# Altium PCB usbasp_V2.PcbDoc
Units mm, origin at the board's own origin, x right, y up, seen from the top; angles counter-clockwise.
Board outline 45.25 x 16.12 mm, 2 copper layers (Top Layer, Bottom Layer), stack 1.635 mm thick; 24 components, 20 nets, 95 pads, 37 vias.
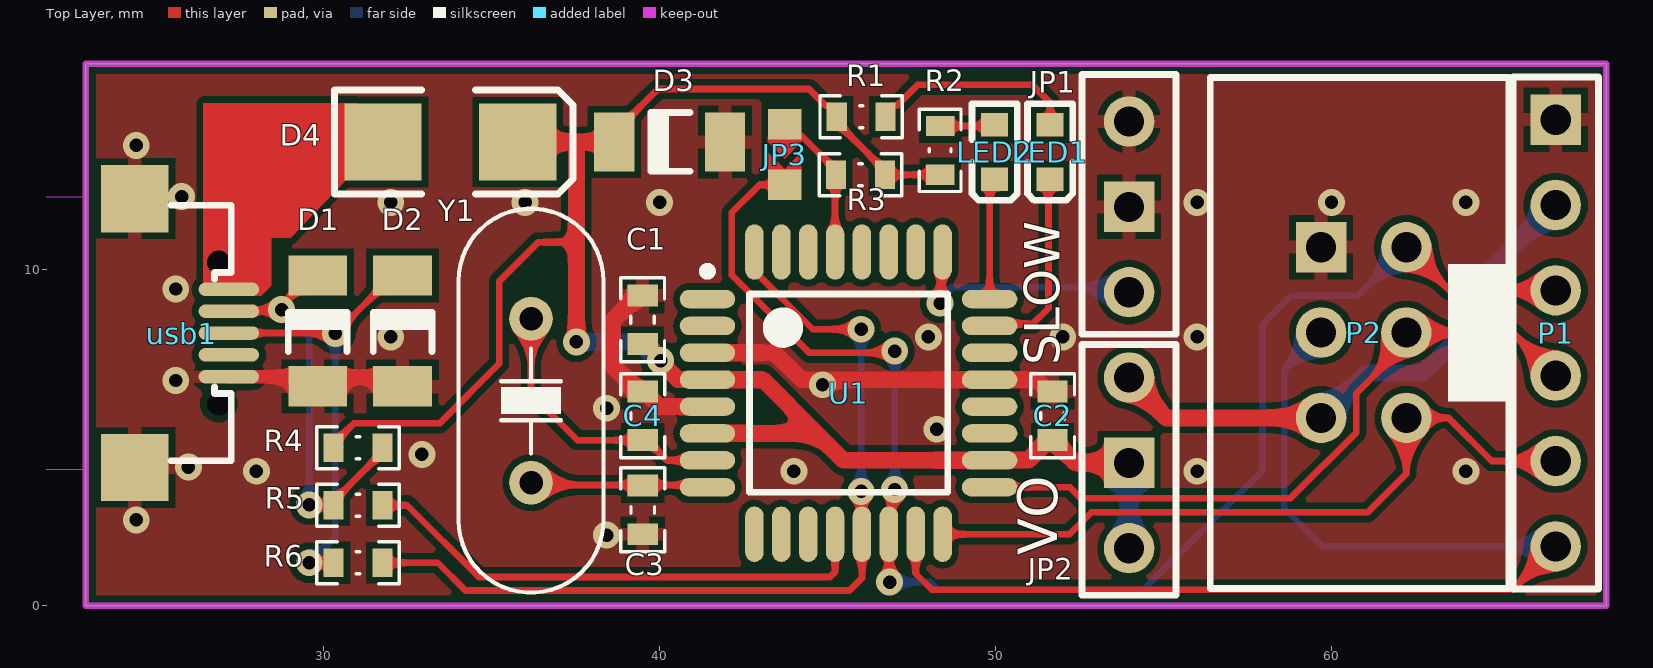
[diagram p0: Top Layer view]
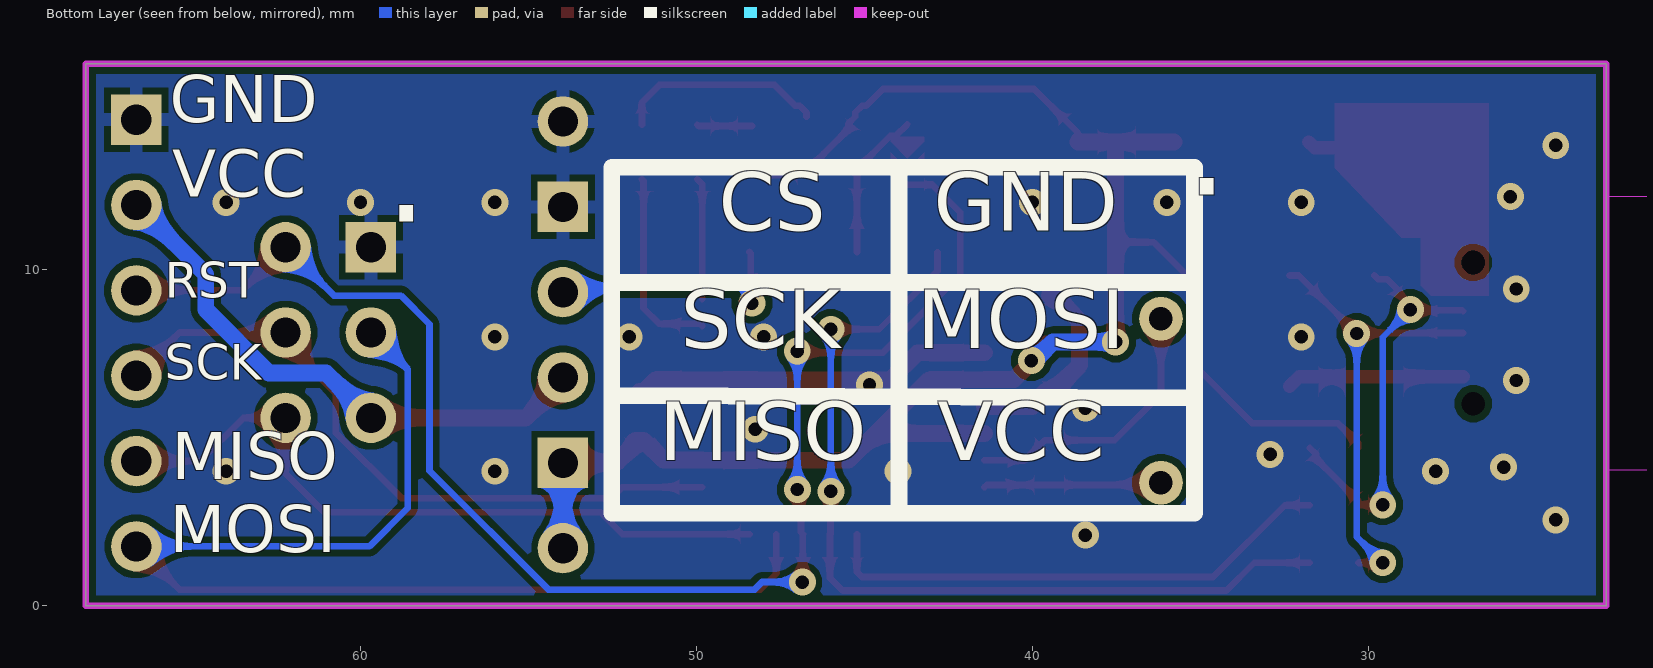
[diagram p1: Bottom Layer view, seen from below]
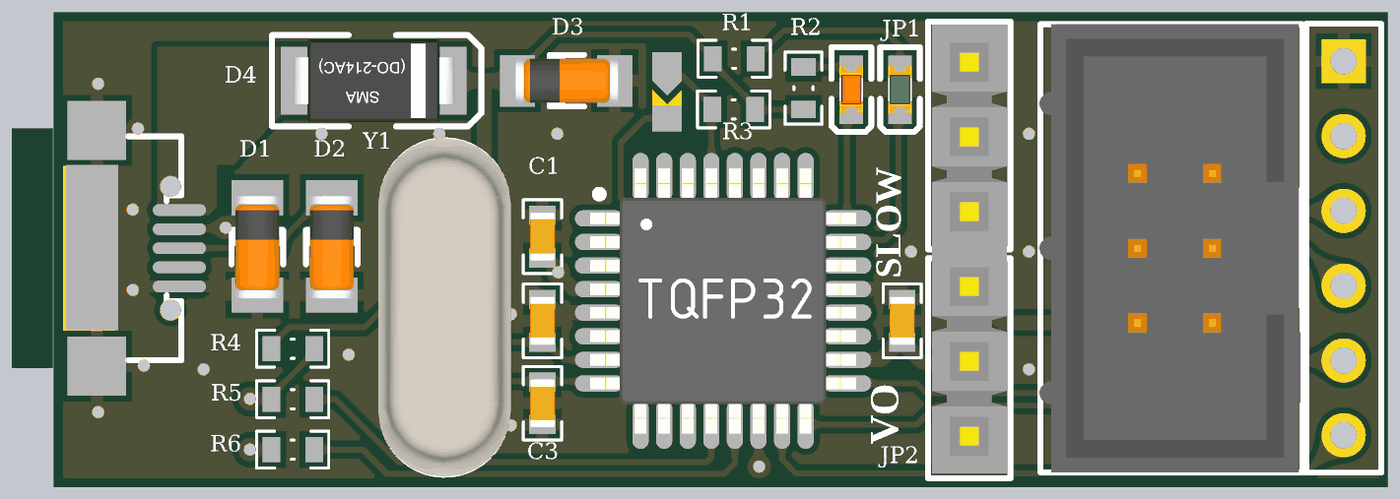
[diagram p2: 3D render of the assembled board from above, using the file's embedded part models]

## Layer stack, top to bottom
Top Solder: solder mask 0.0102, Solder Resist, Dk 3.5
Top Layer: signal copper 0.0175
Dielectric 1: dielectric 1.6, FR-4, Dk 4.8
Bottom Layer: signal copper 0.0175
Bottom Solder: solder mask 0.0102, Solder Resist, Dk 3.5

## Board outline
22.925,0 22.925,16.125 68.175,16.125 68.175,0

## Design rules (kind name [scope] priority, off if disabled: settings)
Clearance [All] p1: gap=0.2 ignorepadtopadclearanceinfootprint=FALSE except(0: Arc-Hole Track-Hole SMDPad-Hole THPad-Hole Via-Hole Fill-Hole Poly-Hole Region-Hole Text-Hole)
PolygonConnect [All] p1: thpad.connectstyle=Relief thpad.reliefconductorwidth=0.4 thpad.reliefentries=4 thpad.polygonreliefangle="90 Angle" thpad.airgapwidth=0.2 smdpad.connectstyle=Relief smdpad.reliefconductorwidth=0.4 smdpad.reliefentries=4 smdpad.polygonreliefangle="90 Angle" smdpad.airgapwidth=0.2 via.connectstyle=Direct via.reliefconductorwidth=0.254 via.reliefentries=4 via.polygonreliefangle="90 Angle" via.airgapwidth=0.254
RoomDefinition usbasp [InComponentClass('usbasp')] p1 off: confinementstyle=ConfineIn formatcopy=TRUE lockcomponents=FALSE outline 157.988,3.048 288.798,3.048 288.798,21.336 157.988,21.336
RoutingVias [All] p1: holewidth=0.5 width=1 viastyle="Through Hole" minholewidth=0.4 minwidth=0.8 maxholewidth=1 maxwidth=1.5
SolderMaskExpansion [All] p1: expansion=0 istentingtop=FALSE
Width [All] p1: maxlimit=0.8 minlimit=0.2 preferedwidth=0.3
30 further rules are at their usual default settings.

## Components (designator, comment, footprint, x,y, rotation, side; value= is the part's Value field where it differs from the comment)
C1 "Cap" cap0603 39.497,8.509 r270 top value=100nF
C2 "Cap" cap0603 51.7,5.65 r90 top value=1u
C3 "Cap" cap0603 39.5,2.85 r90 top value=22pF
C4 "Cap" cap0603 39.5,5.65 r270 top value=22pF
D1 "Diode Zener" "Diode 1n4148 SMD" 29.825,6.525 r90 top
D2 "Diode Zener" "Diode 1n4148 SMD" 32.35,6.525 r90 top
D3 "Diode Zener" "Diode 1n4148 SMD" 41.95,13.8 r180 top
D4 "1n5822" DO-214AC(SMA) 33.775,13.8 r270 top
JP1 "Slow clk" "jumper selector" 53.975,9.329 r90 top
JP2 "VCC OUT" "jumper selector" 53.975,1.709 r90 top
JP3 "Jumper 2Pin" PCBComponent_1 43.725,13.3 r270 top
LED1 "Green" "LED_0603 G" 51.625,13.5 r270 top
LED2 "Red" "LED_0603 R" 49.975,13.5 r270 top
P1 "Header 6" HDR1X6 66.675,1.763 r90 top locked
P2 "IDC 2X3" "IDC Socket Male 6pin Straight THT Goldplated 2_54mm" 60.96,8.128 r90 top locked
R1 "1K" RES0603 46,14.55 r180 top
R2 "1K" RES0603 48.35,13.55 r270 top
R3 "10K" RES0603 45.982,12.827 r0 top
R4 "2.2K" RES0603 31.025,4.7 r180 top
R5 "47" RES0603 31.025,2.987 r180 top
R6 "47" RES0603 31.025,1.275 r180 top
U1 "ATmega8A-AU" TQFP32_N 45.625,6.325 r0 top
usb1 "USB Connector" USB_AB_BM_SHS 25.781,8.113 r90 top locked
Y1 "12MHz" "CRYSTAL Small" 36.175,6.1 r270 top

## Footprints (in the part's own frame and the unit in brackets; to place one, negate y for a bottom-side part, rotate by r counter-clockwise, add the part's x,y. Pads: shape width x height; smd on the part's side, far side on the other; paste and mask are expansions set on the pad)
cap0603 [mm] "Chip Capacitor, 2-Leads, Body 1/60x0/80mm, IPC Medium Density DESIGNER:ABBAS BASEREH"
  rect 0.65x0.9 smd: 1(-0.725,0) 2(0.725,0)
  silkscreen extent -1.25,-0.65 1.25,0.65, body extent -0.82,-0.43 0.82,0.43, height 0.4
"CRYSTAL Small" [mm] "DESIGNER ABBAS BASEREH"
  round 1.3 hole 0.7: 1(-2.44,0) 2(2.44,0)
  silkscreen extent -5.71,-2.16 5.71,2.16, body extent -5.75,-2.25 5.75,2.25, height 3.61
"Diode 1n4148 SMD" [mm] "Mini MELF SOD-80"
  rect 1.2x1.75 smd: 1(0,0) 2(3.3,0)
  silkscreen extent 1.04,-0.88 2.22,0.87, body extent -0.13,-0.75 3.37,0.75, height 1.55
DO-214AC(SMA) [mm]
  rect 2.3x2.3 smd: 1(0,-2.003) 2(0,2.003)
  silkscreen extent -1.55,-3.45 1.55,3.65, body extent -1.4,-2.75 1.4,2.75, height 2.6
HDR1X6 [mm] "Connector; Header; 6 Position"
  round 1.5 hole 0.9: 1(0,0) 2(2.54,0) 3(5.08,0) 4(7.62,0) 5(10.16,0)
  rect 1.5x1.5 hole 0.9: 6(12.7,0)
  silkscreen extent -1.27,-1.27 13.97,1.27
"IDC Socket Male 6pin Straight THT Goldplated 2_54mm" [mm]
  round 1.5 hole 0.9: 1(-2.54,-1.27) 2(-2.54,1.27) 3(0,-1.27) 4(0,1.27) 5(2.54,-1.27)
  rect 1.5x1.5 hole 0.9: 6(2.54,1.27)
  silkscreen extent -7.62,-4.41 7.59,4.57, body extent -7.62,-4.24 7.6,4.61, height 9.13
"jumper selector" [mm]
  round 1.5 hole 0.9: 1(0,0) 3(5.08,0)
  rect 1.5x1.5 hole 0.9: 2(2.54,0)
  silkscreen extent -1.25,-1.4 6.48,1.4, body extent -1.24,-1.27 6.38,1.27, height 10.16
"LED_0603 G" [mm]
  rect 0.7x0.8 smd: 1(-0.812,0) 2(0.813,0)
  silkscreen extent -1.44,-0.67 1.44,0.68, body extent -0.8,-0.4 0.8,0.4, height 0.6
"LED_0603 R" [mm]
  rect 0.7x0.8 smd: 1(-0.813,0) 2(0.813,0)
  silkscreen extent -1.44,-0.67 1.44,0.67, body extent -0.8,-0.4 0.8,0.4, height 0.6
PCBComponent_1 [mm]
  rect 0.9x1 smd: 1(-1.025,0) 2(0.775,0)
  Top Layer region: -0.5,0.5 0,0 -0.5,-0.5 -0.65,-0.5 -0.65,0.5
  Top Layer region: 0.35,0.5 -0.2,0.5 0.35,-0.05
  Top Layer region: 0.35,0.05 0.35,-0.5 -0.2,-0.5
RES0603 [mm] "Chip Resistor, 2-Leads, Body 1/60x0/80mm, IPC Medium Density DESIGNER:ABBAS BASEREH"
  rect 0.6x0.85 smd: 1(-0.725,0) 2(0.725,0)
  silkscreen extent -1.22,-0.63 1.22,0.63
TQFP32_N [mm] "Thin QFP, 32-Leads, Body 7x7mm, Pitch 0.8mm, IPC Medium Density"
  oval 1.65x0.55 smd: 1(-4.2,2.8) 2(-4.2,2) 3(-4.2,1.2) 4(-4.2,0.4) 5(-4.2,-0.4) 6(-4.2,-1.2) 7(-4.2,-2) 8(-4.2,-2.8) 17(4.2,-2.8) 18(4.2,-2) 19(4.2,-1.2) 20(4.2,-0.4) 21(4.2,0.4) 22(4.2,1.2) 23(4.2,2) 24(4.2,2.8)
  oval 0.55x1.65 smd: 9(-2.8,-4.2) 10(-2,-4.2) 11(-1.2,-4.2) 12(-0.4,-4.2) 13(0.4,-4.2) 14(1.2,-4.2) 15(2,-4.2) 16(2.8,-4.2) 25(2.8,4.2) 26(2,4.2) 27(1.2,4.2) 28(0.4,4.2) 29(-0.4,4.2) 30(-1.2,4.2) 31(-2,4.2) 32(-2.8,4.2)
  silkscreen extent -4.32,-2.95 2.95,3.75, body extent -4.51,-4.51 4.51,4.51, height 1.1
USB_AB_BM_SHS [mm] "USB Micro AB - Standard (Bottom mount), Shell SMT DESIGNER ABBAS BASEREH"
  oval 0.4x1.8 smd: 1(1.3,-1.4) 2(0.65,-1.4) 3(0,-1.4) 4(-0.65,-1.4) 5(-1.3,-1.4)
  rect 2x2 smd: 5(-4,1.4) 5(4,1.4)
  round 0 hole 0.7: H(-2.1,-1.1) H(2.1,-1.1)
  Keep-Out Layer board cut-out: -4.064,2.9 -4.064,4.291 4.064,4.291 4.064,2.9
  silkscreen extent -3.8,-1.47 3.8,0.33, body extent -4,-1.78 4,4.26, height 2.75

## Part data
C1 C3 C4: library part "Cap ceramic", "=value"
C2: library part "Cap Pol", "CAP-3300Uf"
D1 D2: "Zener Diode", Voltage="3.6 V", Company=E.P.I.L, Design Date=2011/11/02, Designer="Saeid Jorablo"
D3: "Zener Diode", Voltage="5.1 V", Company=E.P.I.L, Design Date=2011/11/02, Designer="Saeid Jorablo"
D4: library part "1N5822 SMD", "Schottky Rectifiers", Manufacturer="ON Semiconductor/Fairchild", Data=16-12-2016, Designer="Abbas Basereh", Link=https://www.aliexpress.com/item/Free-shipping-100pcs-1n5822-sma-smd-do-214ac-Schottky-diode-ss34/32337482329.html?spm=2114.01010208.3.1.zLZDsP&ws_ab_test=searchweb0_0,searchweb201602_4_10065_10068_10084_10083_10080_10082_10081_10060_10061_10062_10056_10055_10054_10059_10099_10078_10079_427_10073_10103_10102_10096_10052_10050_10051,searchweb201603_4&btsid=6e50dc92-ac69-45bc-a19e-209af19ce602, Part. No=SS34
JP1 JP2: library part "Jumper Selector", "Jumper Selector"
JP3: "Jumper, 2-Pin", Data=16-12-2016, Designer="Abbas Basereh"
LED1 LED2: library part LED0, "Typical INFRARED GaAs LED", LatestRevisionDate=08-Jul-2005, LatestRevisionNote="Mech Layer 1 removed.", PackageDescription="LED; 2 Leads", PackageReference=LED-0, Published=8-Jun-2000, Publisher="Altium Limited"
P1: "Header, 6-Pin", LatestRevisionDate=17-Jul-2002, LatestRevisionNote="Re-released for DXP Platform.", Publisher="Altium Limited"
R1 R2 R3 R4 R5 R6: library part Res1, "Resistor", LatestRevisionDate=17-Jul-2002, LatestRevisionNote="Re-released for DXP Platform.", PackageDescription="Axial Device, Thru-Hole; 2 Leads; 0.3 in Pin Spacing", PackageReference=AXIAL-0.3, Published=8-Jun-2000, Publisher="Altium Limited"
U1: "8-bit AVR Microcontroller, 8KB Flash, 512 Bytes EEPROM, 1KB SRAM, 32-pin TQFP, Industrial Grade (-40°C to 85°C)", Supplier Part Number 1=ATMEGA8A-AU-ND, Code_JEDEC=MS-026-ABA, ComponentLink1Description="Manufacturer Link", ComponentLink1URL=http://www.atmel.com/products/avr/default.asp?, ComponentLink2Description="ATmega8A Datasheet", ComponentLink2URL=http://www.atmel.com/dyn/resources/prod_documents/doc8159.pdf, ComponentLink3Description="ATmega8A Summary", ComponentLink3URL=http://www.atmel.com/dyn/resources/prod_documents/8159S.pdf, ComponentLink4Description="Atmel.com Home", ComponentLink4URL=http://www.atmel.com, DatasheetVersion="revC, Jul-2009", PackageDescription="32-Lead, 7x7x1.0 mm Body, 0.8mm Lead Pitch, Thin Profile Plastic Quad Flat Package (TQFP)", PackageReference=32A, PackageVersion="revB, Oct-2001", Published=1-Apr-2010, Publisher="Altium Limited", Supplier 1=Digi-Key, Supplier 2=Farnell, Supplier 3=Mouser, Supplier Part Number 2=1748532, Supplier Part Number 3=556-ATMEGA8A-AU
usb1: library part "USB MICRO", "USB Connector MICRO-B Type", Max Current=1600mA, Category=Connector, ComponentLink1Description=Datasheet, ComponentLink2Description=Reference, Designer="ABBAS BASEREH", Mounting Technology="Surface Mount\Through-Hole", Pin Count=5-7, Publisher="ABBAS BASEREH", Status=Unreleased, Update=1395-11-17
Y1: library part CRYSTAL, "Crystal"

## Via types
v1: diameter 0.8, hole 0.4, Top Layer to Bottom Layer, tented both sides, 37 vias

## Nets (pads, with @x,y where several pads share a name; then routed paths per layer and width w, separated by ;. In a path a pad name is that pad's centre, name@x,y a point inside that pad or via, vN(x,y) a via of type N, cw(c..) or ccw(c..) an arc to the next point about the centre after c; other vN are vias at no path point)
DM: R5.1 U1.12 | length 15.5
  Top Layer w0.2: R5.1 32.488,2.987 34.625,0.85 45.075,0.85 45.225,1 U1.12
DM_in: D1.2 R4.1 R5.2 usb1.2 | length 12.4
  Top Layer w0.2: usb1.2 27.206,8.788 28.725,8.788 v1(28.75,8.813) 28.75,8.93 29.05,9.23 29.05,9.325 29.442,9.717 29.717,9.717 D1.2 ; v1(29.575,3) 30.287,3 R5.2 30.3,3.112 31.55,4.362 31.55,4.5 R4.1
  Bottom Layer w0.2: v1(28.75,8.813) 29.575,7.988 v1(29.575,3)
DP: R6.1 U1.13 U1.32 | length 26.6
  Top Layer w0.2: R6.1 33.4,1.275 34.225,0.45 45.65,0.45 46.025,0.825 U1.13 46.012,2.138 46.012,3.388 v1(46,3.4) ; U1.32@42.825,10.52 42.825,9.962 44.562,8.225 v1(46,8.225)
  Bottom Layer w0.2: v1(46,3.4) v1(46,8.225)
DP_in: D2.2 R6.2 usb1.3 | length 13.7
  Top Layer w0.2: usb1.3 v1@30.35,8.113 ; v1(29.575,1.275) R6.2 ; v1@30.363,8.113 32.075,9.825 D2.2
  Bottom Layer w0.2: v1(29.575,1.275) 30.35,2.05 v1(30.35,8.1)
GND: C1.1 C2.2 C3.1 C4.1 D1.1 D2.1 D3.1 JP1.2 JP1.3 P1.6 P2.6 U1.3 U1.5 U1.21 usb1.5 | length 22
  Top Layer w0.4: usb1.5@27.181,6.813 32.062,6.813 D2.1
  Top Layer w0.5: C1.1 39.372,9.234 38.597,8.459 38.597,7.153 39.375,6.375 C4.1 39.625,6.375 39.7,6.3 39.7,6.218 39.993,5.925 U1.5 ; U1.3 43.425,7.525 44.225,6.725 U1.21 51.225,6.725 51.575,6.375 C2.2
  other v1: 38.425,2.1 24.425,2.55 28,4 44,4 56,4 64,4 25.975,4.125 32.925,4.5 48.25,5.25 38.425,5.875 44.85,6.575 25.6,6.7 32,8 48,8 52,8 56,8 25.6,9.425 32,12 36,12 40,12 56,12 60,12 64,12 25.775,12.175 24.425,13.7
GREEN: LED1.2 U1.23 | length 5.8
  Top Layer w0.2: U1.23 49.892,8.392 51.117,8.392 51.575,8.85 51.575,12.637 LED1.2
MISO: P1.2 P2.1 U1.16 | length 21.2
  Top Layer w0.2: U1.16 52.2,2.125 52.85,2.775 61.075,2.775 62.23,3.93 P2.1 63.487,5.588 64.772,4.303 P1.2
MOSI: P1.1 P2.4 U1.15 | length 35.2
  Top Layer w0.2: U1.15 47.625,0.95 48.101,0.474 65.386,0.474 P1.1
  Bottom Layer w0.2: P2.4 58.594,7.032 58.594,2.906 59.737,1.763 P1.1
NetC3_2: C3.2 U1.8 Y1.2 | length 5.3
  Top Layer w0.2: Y1.2 36.243,3.592 41.358,3.592 U1.8
NetC4_2: C4.2 U1.7 Y1.1 | length 8.3
  Top Layer w0.2: Y1.1 36.175,6.3 37.55,4.925 C4.2 39.625,4.925 40.225,4.325 U1.7
NetLED1_1: LED1.1 R1.1 | length 6.2
  Top Layer w0.2: R1.1 46.725,14.675 46.925,14.875 47.05,14.875 47.675,15.5 51.1,15.5 51.625,14.975 LED1.1
NetLED2_1: LED2.1 R2.1 | length 1.6
  Top Layer w0.2: R2.1 49.937,14.275 LED2.1
RED: LED2.2 U1.24 | length 3.6
  Top Layer w0.2: U1.24 49.825,12.538 LED2.2
reset: JP3.1 R3.1 U1.29 | length 4.5
  Top Layer w0.2: JP3.1 44.075,13.975 44.234,13.975 45.257,12.952 R3.1 45.225,12.795 U1.29
SCK: P1.3 P2.3 U1.17 | length 20.4
  Top Layer w0.2: U1.17 52.2,3.525 52.526,3.199 58.785,3.199 60.74,5.153 60.74,6.323 62.23,7.813 P2.3 65.39,8.128 P1.3
SLOW: JP1.1 U1.25 | length 7.5
  Top Layer w0.2: v1(48.35,9) 48.388,9.038 48.388,10.487 U1.25
  Bottom Layer w0.2: v1(48.35,9) 48.35,9.125 48.7,9.475 53.829,9.475 JP1.1
SS: JP3.2 P1.4 P2.5 U1.14 | length 43.8
  Top Layer w0.2: JP3.2 42.975,12.525 42.15,11.7 42.15,9.837 44.462,7.525 46.95,7.525 v1(47,7.575) ; v1(46.85,0.7) 46.837,0.713 46.837,2.113 U1.14 46.892,2.192 46.892,3.349 v1(46.998,3.455) ; P2.5 63.515,9.383 P1.4
  Bottom Layer w0.2: v1(46.85,0.7) 48.05,0.7 48.276,0.474 54.41,0.474 57.95,4.014 57.95,8.375 58.8,9.225 60.787,9.225 P2.5 ; v1(46.998,3.455) 46.998,7.398 47,7.4 v1(47,7.575)
VCC: C1.2 C2.1 D3.2 D4.2 JP2.1 JP2.2 R1.2 R2.2 R3.2 R4.2 U1.4 U1.6 U1.18 | length 56.8
  Top Layer w0.2: R4.2 30.3,4.825 30.5,5.025 30.9,5.425 33.45,5.425 35.225,7.2 35.225,9.65 36.387,10.812 37.525,10.812 ; D3.2 38.65,14.075 39.95,15.375 44.45,15.375 44.95,14.875 45.075,14.875 45.275,14.675 R1.2 45.475,14.35 45.475,14.184 46.707,12.952 R3.2 46.709,12.825 R2.2
  Top Layer w0.5: D4.2 37.55,13.8 ; v1(37.525,7.85) 37.525,10.812 37.525,13.775 37.55,13.8 ; D3.2 37.55,13.8 ; C1.2 39.622,7.784 40.031,7.375 v1(40.031,7.295) ; v1@40.131,7.15 40.136,7.15 40.552,6.735 41.415,6.735 U1.4 43.075,6.725 44.675,5.125 ; U1.6 44.675,5.125 ; JP2.2 53.974,4.25 52.375,4.25 51.9,4.725 51.9,4.85 51.825,4.925 51.575,4.925 50.985,4.335 49.835,4.335 U1.18 45.475,4.325 44.675,5.125
  Bottom Layer w0.5: v1(37.525,7.85) 39.394,7.85 39.95,7.295 v1(40.031,7.295) ; JP2.1@53.975,1.524 JP2.2@53.975,4.064
VCC_O: JP2.3 P1.5 P2.2 | length 16.4
  Top Layer w0.5: JP2.3@53.975,6.604 54.064,6.604 55.08,5.588 P2.2
  Bottom Layer w0.5: P2.2 61.03,6.928 62.727,6.928 64.605,8.806 64.605,9.853 P1.5
VCC_USB: D4.1 usb1.1 usb1.H@26.881,10.213 | length 7.7
  Top Layer w0.4: usb1.1 27.681,9.413 27.681,11.656 29.65,13.625 31.597,13.625 D4.1
pads on no net: U1.1 U1.2 U1.9 U1.10 U1.11 U1.19 U1.20 U1.22 U1.26 U1.27 U1.28 U1.30 U1.31 usb1.4 usb1.H@26.881,6.013

## Polygon pours and split planes (outlines as drawn)
GND on Top Layer "GND_L01_P000" (solid, pour order 0): 22.925,16.2 22.925,0.05 22.95,0.025 68.15,0.025 68.15,16.1 68.1,16.15
GND on Bottom Layer "GND_L02_P001" (solid, pour order 1): 22.925,16.2 22.925,0.05 22.95,0.025 68.15,0.025 68.15,16.1 68.1,16.15

## Keep-outs
Keep-Out Layer:
  the board outline again, w0.2

## Other copper
Top Layer:
  region net VCC_USB: 26.425,9.225 28.15,9.225 28.45,9.525 28.45,10.95 29.025,10.95 31,13.025 31,13.15 31,14.95 26.425,14.95

## Silkscreen, mask and mechanical layers (free items; w line width, h text height)
Top Overlay:
  text "SLOW" at 52.25,7.15 h1.8 r90
  text "VO" at 52.225,1.5 h2 r90
Bottom Overlay:
  lines w0.5: 35.2,6.182 52.525,6.258 ; 35.225,9.617 52.425,9.617 ; 43.975,2.75 43.975,13.05 ; 35.175,2.75 35.175,13.05 52.525,13.05 52.525,2.75 35.175,2.75
  text "GND" at 65.673,13.933 h2.4
  text "VCC" at 65.598,11.708 h2.4
  text "." at 34.175,11.275 h5
  text "GND" at 42.931,10.575 h3
  text "CS" at 49.33,10.575 h3
  text "." at 58,10.475 h5
  text "RST" at 65.825,8.825 h1.8
  text "MOSI" at 43.425,7.075 h3
  text "SCK" at 50.473,7.075 h3
  text "SCK" at 65.825,6.375 h1.8
  text "VCC" at 42.823,3.75 h3
  text "MISO" at 51.107,3.75 h3
  text "MISO" at 65.625,3.3 h2.4
  text "MOSI" at 65.673,1.133 h2.4
Top Paste:
  rectangle: 23.331,5.325 25.1,10.938
Top Solder:
  rectangle: 23.231,5.3 25,10.913

## Text inside footprints (layer, text, board x,y; h text height)
usb1: Mechanical 1 "PCB EDGE" at 22.633,5.7 h0.7 r90